# Altium PCB Main.PcbDoc
Units mil, origin at the board's own origin, x right, y up, seen from the top; angles counter-clockwise.
Board outline 4600 x 6680 mil, 2 copper layers (Top Layer, Bottom Layer); 76 components, 76 nets, 286 pads, 23 vias.
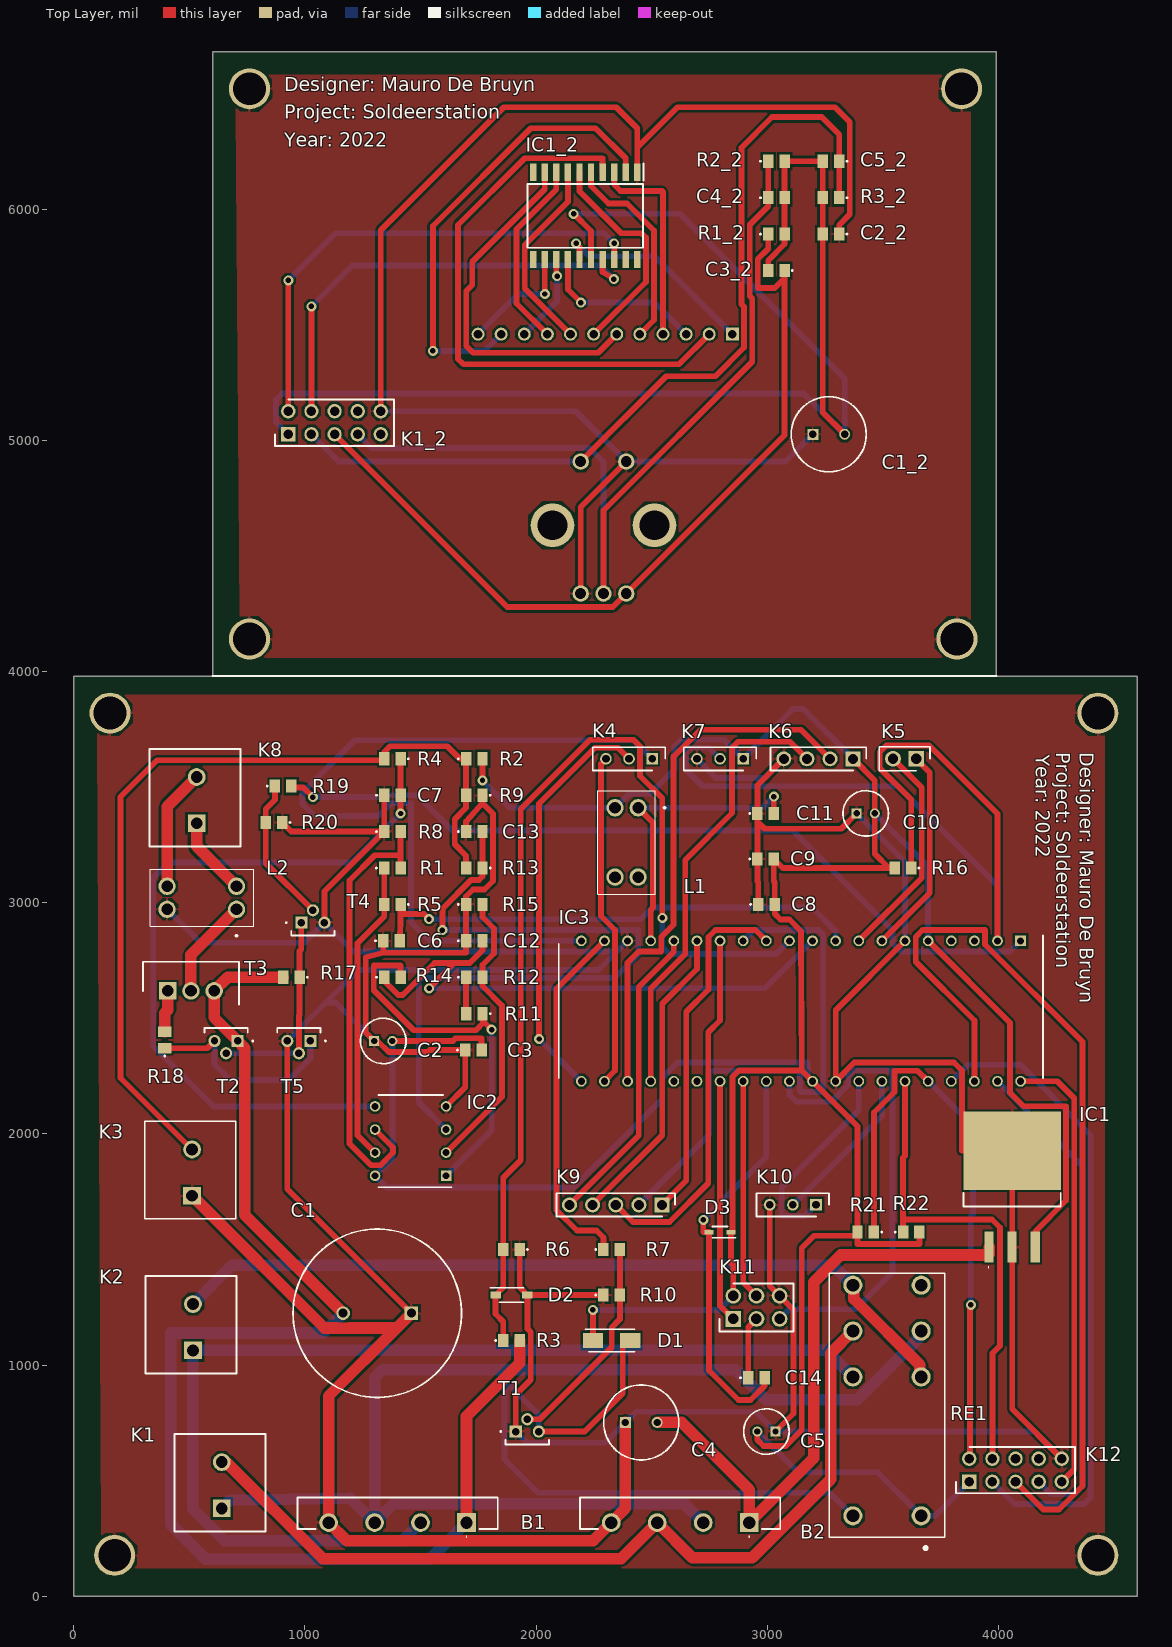
[diagram p0: Top Layer view]
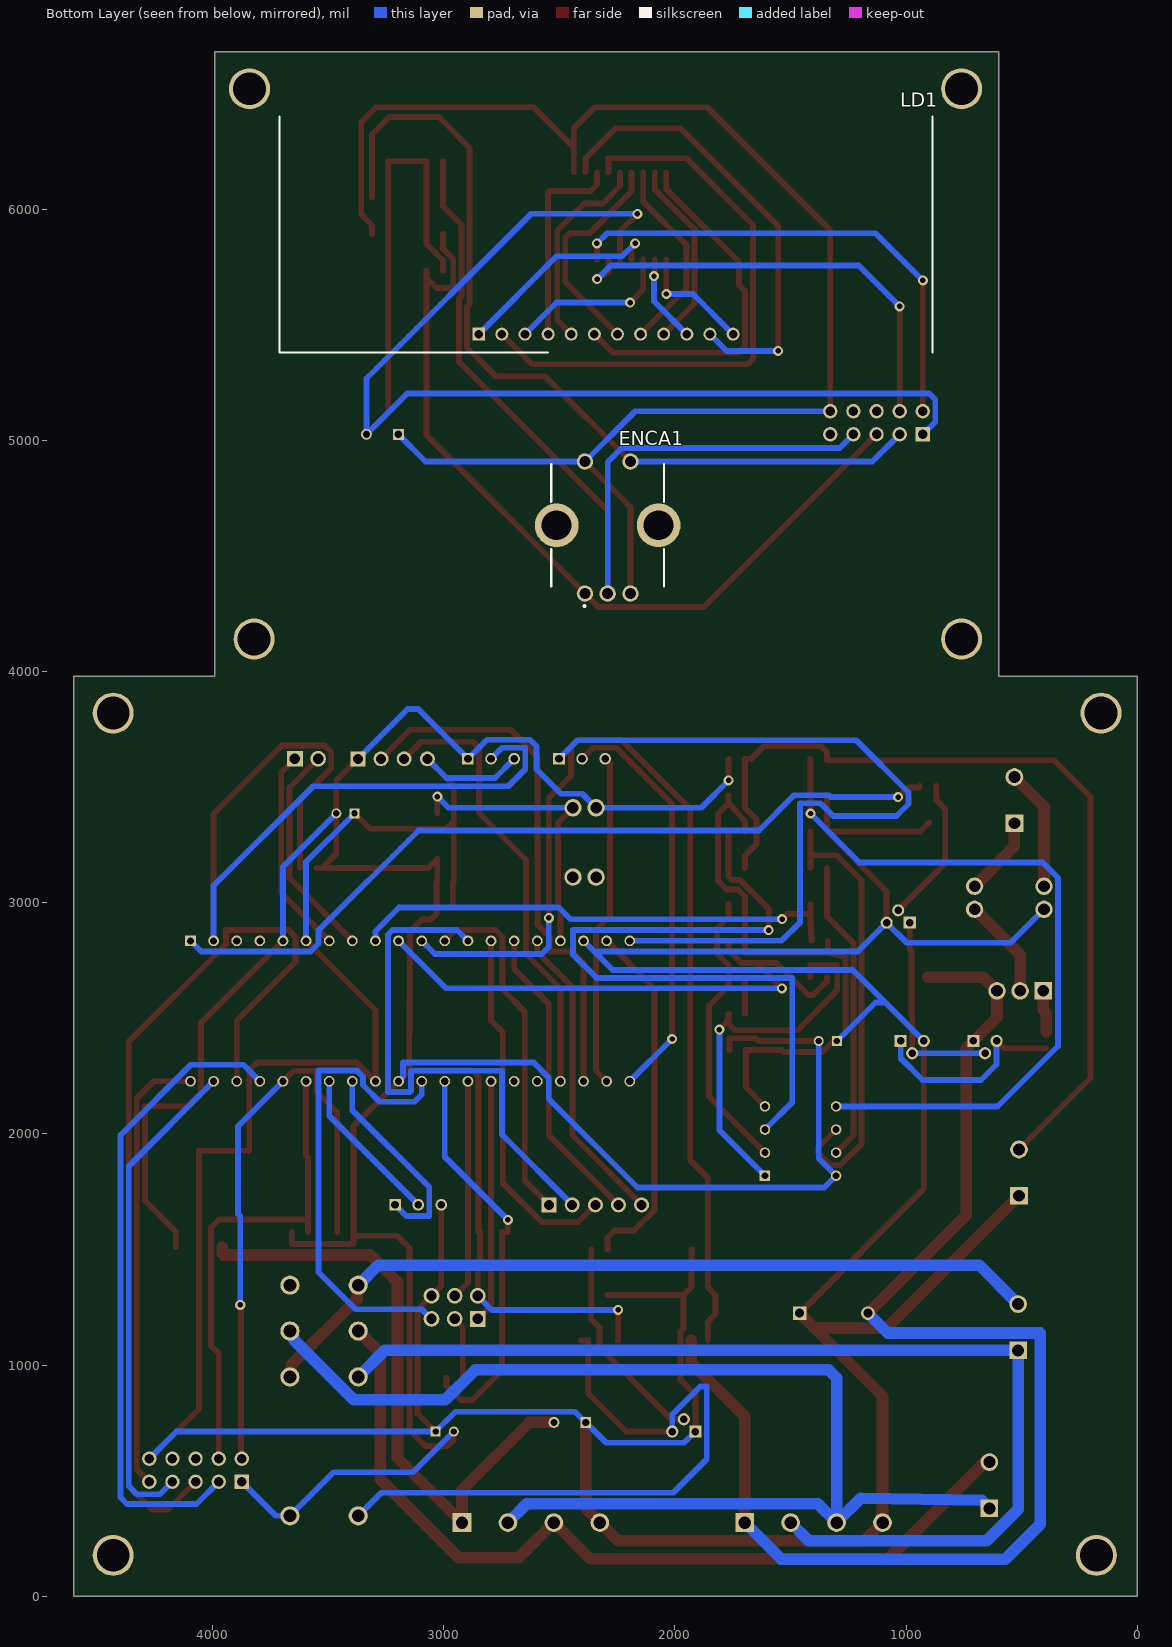
[diagram p1: Bottom Layer view, seen from below]
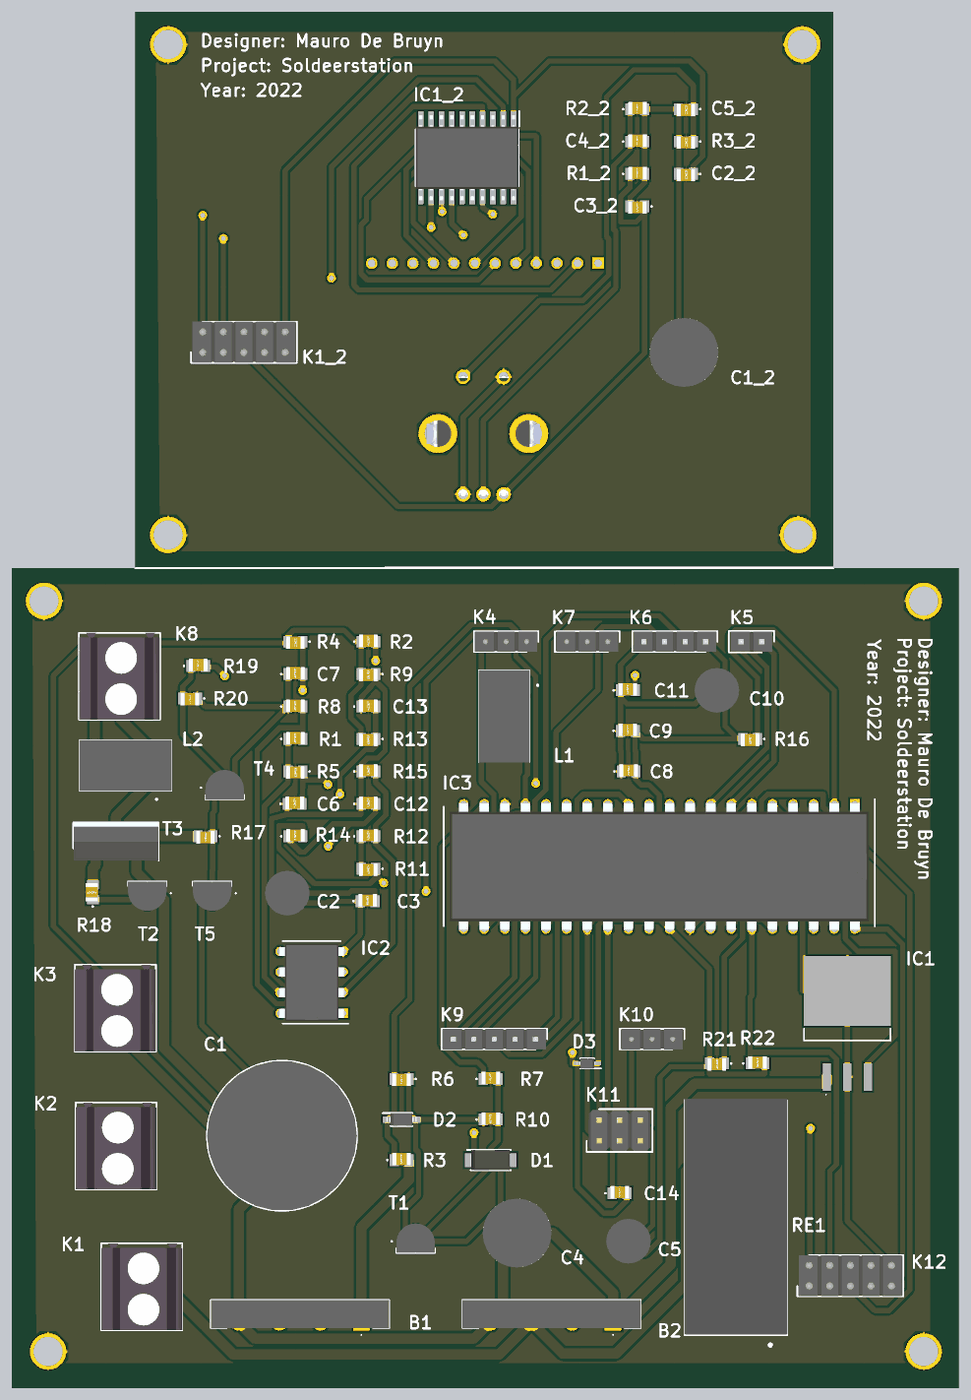
[diagram p2: 3D render of the assembled board from above, using the file's embedded part models]

## Layer stack, top to bottom
Top Solder: solder mask 0.4, Solder Resist, Dk 3.5
Top Layer: signal copper 1.4
Dielectric 1: dielectric 12.6, FR-4, Dk 4.8
Bottom Layer: signal copper 1.4
Bottom Solder: solder mask 0.4, Solder Resist, Dk 3.5

## Board outline
600,6680 3990,6680 3990,3980 4600,3980 4600,0 0,0 0,3980 600,3980 600,6620

## Design rules (kind name [scope] priority, off if disabled: settings)
Clearance [All] p1: gap=10 ignorepadtopadclearanceinfootprint=FALSE except(0: Arc-Hole Track-Hole SMDPad-Hole THPad-Hole Via-Hole Fill-Hole Poly-Hole Region-Hole Text-Hole)
Height [All] p1 off: minheight=0 maxheight=1000 prefheight=500
PolygonConnect [All] p1: connectstyle=Relief reliefconductorwidth=10 reliefentries=4 polygonreliefangle="90 Angle" airgapwidth=10
RoutingVias [All] p1: holewidth=23.62 width=43.31 viastyle="Through Hole" minholewidth=23.62 minwidth=43.31 maxholewidth=23.62 maxwidth=43.31
SolderMaskExpansion [All] p1: expansion=4 istentingtop=FALSE
Width [All] p1: maxlimit=50 minlimit=25 preferedwidth=25 minimp=50.000000 maximp=50.000000 favimp=50.000000
29 further rules are at their usual default settings.

## Classes and differential pairs
component class Transistor: K8 L2 R17 R18 R19 R20 T2 T3 T4 T5
component class Opam: C2 C3 C6 C7 C12 C13 IC2 K3 R1 R2 R4 R5 R8 R9 R11 R12 R13 R14 R15
component class Display: C1_2 C2_2 C3_2 C4_2 C5_2 ENCA1 IC1_2 K1_2 LD1 R1_2 R2_2 R3_2
component class CPU: C8 C9 C10 C11 C14 D3 IC3 K4 K5 K6 K7 K9 K10 K11 K12 L1 R16 R21 R22
component class "Bridge Rectifier": B1 B2 C1 C4 C5 D1 D2 IC1 K1 K2 R3 R6 R7 R10 RE1 T1

## Components (designator, comment, footprint, x,y, rotation, side; value= is the part's Value field where it differs from the comment)
B1 "GBU606-G" GBU606G 1698.5,318.58 r0 top
B2 "GBU606-G" GBU606G 2920.94,318.58 r0 top
C1 "4700µF" CAPPRD750W80D1850H4150 1460.32,1224.09 r180 top
C1_2 "100µF" CAPPRD350W60D825H1300 3196.46,5025.59 r0 top
C2 "10µF" CAPPRD200W52D500H1250 1299.21,2401.57 r0 top
C2_2 "100n" C0805 3275.2,5891.73 r180 top
C3 "100n" C0805 1728.35,2362.2 r0 top
C3_2 "10n" C0805 3038.98,5734.25 r180 top
C4 "100µF" CAPPRD350W60D825H1300 2385.51,751.65 r0 top
C4_2 "10n" C0805 3038.98,6049.21 r0 top
C5 "10µF" CAPPRD200W52D500H1250 3035.12,712.28 r180 top
C5_2 "10n" C0805 3275.2,6206.69 r180 top
C6 "10n" C0805 1374.02,2834.65 r0 top
C7 "10n" C0805 1377.95,3464.57 r0 top
C8 "100n" C0805 2996.06,2992.13 r0 top
C9 "100n" C0805 2992.13,3188.98 r0 top
C10 "10µF" CAPPRD200W52D500H1250 3385.83,3385.83 r0 top
C11 "100n" C0805 2992.13,3385.83 r0 top
C12 "10n" C0805 1732.28,2834.65 r0 top
C13 "10n" C0805 1732.28,3307.09 r0 top
C14 "100n" C0805 2952.76,944.88 r0 top
D1 "FM4007W-W" DIOM5025X231N 2326.46,1105.98 r0 top
D2 "5.1V" SOD3716X135N 1893.39,1302.83 r0 top
D3 "MMSZ4" SOD2512X110N 2795.28,1574.8 r180 top
ENCA1 "PEC11R-4225F-S0024" PEC12R-4XXXF-SXXXX_1 2290.94,4631.89 r180 bottom
IC1 "TL780-05CKTTR" TL78005CKTTR 4058.74,1775.28 r0 top
IC1_2 "TM1637" tm1637 2212.2,5970.47 r270 top
IC2 "MCP6002-E_P" DIP781W56P254L950H533Q8N 1456.69,1968.5 r180 top
IC3 "ATMEGA4809-PF" DIP1543W58P254L5175H635Q40N 3145.28,2530.91 r270 top
K1 "2 Pin Connector 1716020000" 1716020000 640,380 r90 top
K1_2 "10Box Header (Flat Cable)" 10BoxHeader 927.95,5025.59 r0 top
K2 "2 Pin Connector 1716020000" 1716020000 515.43,1063.46 r90 top
K3 "2 Pin Connector 1716020000" 1716020000 511.81,1732.28 r90 top
K4 "M20-9990345" HDRV3W64P0X254_1X3_762X254X864P 2501.57,3622.05 r180 top
K5 "M20-9990246" HDRV2W66P0X254_1X2_508X254X874P 3643.31,3622.05 r180 top
K6 "UART2" HDRV4W64P0X254_1X4_1016X254X834P 3370.87,3622.05 r180 top
K7 "M20-9990345" HDRV3W64P0X254_1X3_762X254X864P 2895.28,3622.05 r180 top
K8 "2 Pin Connector 1716020000" 1716020000 531.5,3343.31 r90 top
K9 "M20-9990545" HDRV5W64P0X254_1X5_1270X254X864P 2544.09,1692.91 r180 top
K10 "UART0" HDRV3W64P0X254_1X3_762X254X864P 3210.24,1692.91 r180 top
K11 "M20-9760342" HDRV6W66P254_2X3_762X508X830P 2852.76,1199.21 r0 top
K12 "10Box Header (Flat Cable)" 10BoxHeader 3873.23,494.96 r0 top
L1 "10μH" VLS56045 2440.94,3410.24 r180 top
L2 "100MH" CM2545X171B10 703.7,2970.87 r90 top
LD1 "7 Sigment" 7-Sigment 2548.43,5458.66 r90 bottom
R1 "18K" C0805 1377.95,3149.61 r0 top
R1_2 "10K" C0805 3038.98,5891.73 r0 top
R2 "1M" C0805 1732.28,3622.05 r0 top
R2_2 "10K" C0805 3038.98,6206.69 r0 top
R3 "68K" C0805 1893.39,1105.98 r0 top
R3_2 "10K" C0805 3275.2,6049.21 r180 top
R4 "5K6" C0805 1377.95,3622.05 r180 top
R5 "5K6" C0805 1377.95,2992.13 r180 top
R6 "10K" C0805 1893.39,1499.68 r180 top
R7 "10K" C0805 2326.46,1499.68 r0 top
R8 "100Ω" C0805 1377.95,3307.09 r0 top
R9 "10M" C0805 1732.28,3464.57 r180 top
R10 "4K7" C0805 2326.46,1302.83 r0 top
R11 "18K" C0805 1732.28,2519.68 r180 top
R12 "18K" C0805 1732.28,2677.17 r0 top
R13 "5K6" C0805 1732.28,3149.61 r180 top
R14 "5K6" C0805 1377.95,2677.17 r0 top
R15 "100Ω" C0805 1732.28,2992.13 r0 top
R16 "4K7" C0805 3586.61,3149.61 r180 top
R17 "4K7" C0805 940.94,2677.17 r180 top
R18 "100Ω" C0805 393.7,2405.51 r90 top
R19 "10K" C0805 905.51,3503.94 r0 top
R20 "4K7" C0805 866.14,3346.46 r180 top
R21 "4K7" C0805 3425.2,1574.8 r180 top
R22 "4K7" C0805 3622.05,1574.8 r0 top
RE1 "RT424005" RT42 3517.4,347.72 r90 top
T1 "BC547CBU" BC547CBU 1911.5,712.28 r0 top
T2 "BC547CBU" BC547CBU 708.66,2401.57 r180 top
T3 "IRF9Z34NPBF" TO254P469X1042X1967-3P 406.81,2618.11 r0 top
T4 "BC547CBU" BC547CBU 984.25,2913.39 r0 top
T5 "BC547CBU" BC547CBU 1023.62,2401.57 r180 top

## Footprints (in the part's own frame and the unit in brackets; to place one, negate y for a bottom-side part, rotate by r counter-clockwise, add the part's x,y. Pads: shape width x height; smd on the part's side, far side on the other; paste and mask are expansions set on the pad)
7-Sigment [mm]
  rect 1.425x1.425 hole 0.95: 1(0,7.62)
  round 1.425 hole 0.95: 2(0,5.08) 3(0,2.54) 4(0,0) 5(0,-2.54) 6(0,-5.08) 7(0,-7.62) 8(0,-10.16) 9(0,-12.7) 10(0,-15.24) 11(0,-17.78) 12(0,-20.32)
  silkscreen extent -2.02,-42.22 23.92,29.52
10BoxHeader [mm]
  rect 1.575x1.575 hole 1.05: 1(0,0)
  round 1.575 hole 1.05: 2(0,2.54) 3(2.54,0) 4(2.54,2.54) 5(5.08,0) 6(5.08,2.54) 7(7.62,0) 8(7.62,2.54) 9(10.16,0) 10(10.16,2.54)
  silkscreen extent -1.46,-1.27 11.62,3.81, body extent -1.27,-1.27 11.43,3.81, height 8.64
1716020000 [mm]
  rect 1.95x1.95 hole 1.3: 1(0,0)
  round 1.95 hole 1.3: 2(5.08,0)
  silkscreen extent -2.54,-4.8 8.17,5.2, body extent -2.54,-4.8 8.17,5.2, height 13.8
BC547CBU [mm]
  rect 1.333x1.333 hole 0.82: 1(0,0)
  round 1.333 hole 0.82: 2(1.27,1.35) 3(2.54,0)
  silkscreen extent -1.7,-1.43 3.65,0.05, body extent -1.11,-1.43 3.65,2.19, height 5.43
C0805 [mm]
  rect 1.15x1.45 smd: 1(-0.9,0) 2(0.9,0)
  silkscreen extent -1.8,-0.05 -1.7,0.05, body extent -1.14,-0.66 1.16,0.89, height 0.98
CAPPRD200W52D500H1250 [mm]
  rect 1.1x1.1 hole 0.7: 1(0,0)
  round 1.1 hole 0.7: 2(2,0)
  silkscreen extent -1.5,-2.5 3.5,2.5, body extent -1.75,-2.75 3.75,2.75, height 12.5
CAPPRD350W60D825H1300 [mm]
  rect 1.2x1.2 hole 0.8: 1(0,0)
  round 1.2 hole 0.8: 2(3.5,0)
  silkscreen extent -2.38,-4.12 5.87,4.12, body extent -2.5,-4.25 6,4.25, height 13
CAPPRD750W80D1850H4150 [mm]
  rect 1.5x1.5 hole 1: 1(0,0)
  round 1.5 hole 1: 2(7.5,0)
  silkscreen extent -5.5,-9.25 13,9.25, body extent -5.5,-9.25 13,9.25, height 41.5
CM2545X171B10 [mil]
  round 75 hole 50: 1(0,0) 2(100,0) 3(100,300) 4(0,300)
  silkscreen extent -118,-74 174,374, body extent -74,-74 174,374, height 378
DIOM5025X231N [mm]
  rect 2.25x1.7 smd: 1(-2.05,0) 2(2.05,0)
  silkscreen extent -2.9,-1.24 2.5,1.24, body extent -2.5,-1.24 2.5,1.24, height 2.31
DIP781W56P254L950H533Q8N [mil]
  rect 45.59x45.59 hole 29.84: 1(-153.74,150)
  round 45.59 hole 29.84: 2(-153.74,50) 3(-153.74,-50) 4(-153.74,-150) 5(153.74,-150) 6(153.74,-50) 7(153.74,50) 8(153.74,150)
  silkscreen extent -177,-200 140,200, body extent -159,-187 159,187, height 210
DIP1543W58P254L5175H635Q40N [mm]
  rect 1.184x1.184 hole 0.784: 1(-7.715,24.13)
  round 1.184 hole 0.784: 2(-7.715,21.59) 3(-7.715,19.05) 4(-7.715,16.51) 5(-7.715,13.97) 6(-7.715,11.43) 7(-7.715,8.89) 8(-7.715,6.35) 9(-7.715,3.81) 10(-7.715,1.27) 11(-7.715,-1.27) 12(-7.715,-3.81) 13(-7.715,-6.35) 14(-7.715,-8.89) 15(-7.715,-11.43) 16(-7.715,-13.97) 17(-7.715,-16.51) 18(-7.715,-19.05) 19(-7.715,-21.59) 20(-7.715,-24.13) 21(7.715,-24.13) 22(7.715,-21.59) 23(7.715,-19.05) 24(7.715,-16.51) 25(7.715,-13.97) 26(7.715,-11.43) 27(7.715,-8.89) 28(7.715,-6.35) 29(7.715,-3.81) 30(7.715,-1.27) 31(7.715,1.27) 32(7.715,3.81) 33(7.715,6.35) 34(7.715,8.89) 35(7.715,11.43) 36(7.715,13.97) 37(7.715,16.51) 38(7.715,19.05) 39(7.715,21.59) 40(7.715,24.13)
  silkscreen extent -8.31,-26.61 7.37,26.61, body extent -7.86,-25.88 7.86,25.88, height 6.35
GBU606G [mm]
  rect 2.055x2.055 hole 1.37: 1(0,0)
  round 2.055 hole 1.37: 2(-5.05,0) 3(-10.1,0) 4(-15.15,0)
  silkscreen extent -18.58,-1.6 3.42,2.76, body extent -18.57,-0.69 3.43,2.76, height 21.05
HDRV2W66P0X254_1X2_508X254X874P [mm]
  rect 1.725x1.725 hole 1.15: 1(0,0)
  round 1.725 hole 1.15: 2(2.54,0)
  silkscreen extent -1.52,-1.32 4.06,1.32, body extent -1.27,-1.27 3.81,1.27, height 8.74
HDRV3W64P0X254_1X3_762X254X864P [mm]
  rect 1.275x1.275 hole 0.85: 1(0,0)
  round 1.275 hole 0.85: 2(2.54,0) 3(5.08,0)
  silkscreen extent -1.44,-1.27 6.52,1.27, body extent -1.27,-1.27 6.35,1.27, height 8.64
HDRV4W64P0X254_1X4_1016X254X834P [mm]
  rect 1.65x1.65 hole 1.1: 1(0,0)
  round 1.65 hole 1.1: 2(2.54,0) 3(5.08,0) 4(7.62,0)
  silkscreen extent -1.44,-1.27 9.07,1.27, body extent -1.27,-1.27 8.89,1.27, height 8.34
HDRV5W64P0X254_1X5_1270X254X864P [mm]
  rect 1.65x1.65 hole 1.1: 1(0,0)
  round 1.65 hole 1.1: 2(2.54,0) 3(5.08,0) 4(7.62,0) 5(10.16,0)
  silkscreen extent -1.44,-1.27 11.61,1.27, body extent -1.27,-1.27 11.43,1.27, height 8.64
HDRV6W66P254_2X3_762X508X830P [mm]
  rect 1.725x1.725 hole 1.15: 1(0,0)
  round 1.725 hole 1.15: 2(0,2.54) 3(2.54,0) 4(2.54,2.54) 5(5.08,0) 6(5.08,2.54)
  silkscreen extent -1.52,-1.37 6.6,3.91, body extent -1.27,-1.27 6.35,3.81, height 8.38
PEC12R-4XXXF-SXXXX_1 [mm]
  round 1.8 hole 1.2: 1(-2.5,-7.5) 2(2.5,-7.5) 3(0,-7.5) 4(-2.5,7) 5(2.5,7)
  round 4.8 hole 3.28: 6(5.6,0) 7(-5.6,0)
  silkscreen extent -6.2,-8.95 6.2,6.7, body extent -7,-7.75 6.99,7.15, height 31.51
RT42 [mm]
  round 2.1 hole 1.4: 1(0,-3.75) 2(15.26,-3.75) 3(20.3,-3.75) 4(25.34,-3.75) 5(25.34,3.75) 6(20.3,3.75) 7(15.26,3.75) 8(0,3.75)
  silkscreen extent -3.67,-6.35 26.65,6.35, body extent -2.21,-6.35 26.79,6.35, height 15.86
SOD2512X110N [mm]
  rect 1x0.5 smd: 1(-1.2,0) 2(1.2,0)
  silkscreen extent -1.7,-0.63 0.85,0.63, body extent -1.25,-0.63 1.25,0.63, height 1.1
SOD3716X135N [mm]
  rect 1.15x0.8 smd: 1(-1.75,0) 2(1.75,0)
  silkscreen extent -2.33,-0.8 1.34,0.8, body extent -1.86,-0.8 1.86,0.8, height 1.35
TL78005CKTTR [mm]
  rect 1x3.4 smd: 1(-2.54,-6.745) 2(0,-6.745) 3(2.54,-6.745)
  rect 10.7x8.6 smd: 4(0,3.855)
  silkscreen extent -5.33,-9 5.33,-0.8
tm1637 [mm]
  rect 1.9x0.7 smd: 1(-4.8,5.715) 2(-4.8,4.445) 3(-4.8,3.175) 4(-4.8,1.905) 5(-4.8,0.635) 6(-4.8,-0.635) 7(-4.8,-1.905) 8(-4.8,-3.175) 9(-4.8,-4.445) 10(-4.8,-5.715) 11(4.8,-5.715) 12(4.8,-4.445) 13(4.8,-3.175) 14(4.8,-1.905) 15(4.8,-0.635) 16(4.8,0.635) 17(4.8,1.905) 18(4.8,3.175) 19(4.8,4.445) 20(4.8,5.715)
  silkscreen extent -5.75,-6.35 3.5,6.42, body extent -5.23,-6.35 5.23,6.35, height 2.8
TO254P469X1042X1967-3P [mm]
  rect 1.92x1.92 hole 1.28: 1(0,0)
  round 1.92 hole 1.28: 2(2.54,0) 3(5.08,0)
  silkscreen extent -2.73,-1.49 7.81,3.2, body extent -2.67,-1.5 7.75,3.19, height 18.84
VLS56045 [mil]
  round 75 hole 50: 1(0,0) 2(100,0) 3(100,300) 4(0,300)
  silkscreen extent -118,-74 174,374, body extent -74,-74 174,374, height 378

## Part data
B1 B2: "Bridge Rectifier", Manufacturer_Name="Comchip Technology", Datasheet Link=https://www.comchiptech.com/product.php?id=2217, Height=20.95mm, Manufacturer_Part_Number=GBU606-G
C1: library part 50PK4700MEFC18X40, "Capacitor Polarised", Manufacturer_Name=Rubycon, Mouser2 Part Number=232-50PK4700MEFC18X4, Datasheet Link=https://componentsearchengine.com//50PK4700MEFC18X40.pdf, Height=41.5mm, Manufacturer_Part_Number=50PK4700MEFC18X40, Mouser2 Price/Stock=https://www.mouser.com/Search/Refine.aspx?Keyword=232-50PK4700MEFC18X4
C1_2 C4: library part RGA101M1HBK-0811G, "Capacitor Polarised", Manufacturer_Name=Lelon, Datasheet Link=https://www.arrow.com/en/products/rga101m1hbk-0811g/lelon-electronics, Height=13mm, Manufacturer_Part_Number=RGA101M1HBK-0811G
C2 C5 C10: library part 860020672010, "Capacitor Polarised", Manufacturer_Name="Wurth Elektronik", Mouser2 Part Number=710-860020672010, Datasheet Link=https://componentsearchengine.com//860020672010.pdf, Height=12.5mm, Manufacturer_Part_Number=860020672010, Mouser2 Price/Stock=https://www.mouser.com/Search/Refine.aspx?Keyword=710-860020672010
C2_2 C3 C3_2 C4_2 C5_2 C6 C7 C8 C9 C11 C12 C13 C14: library part 0805_1, "Capacitor", Manufacturer_Name=Kemet, Manufacturer_Part_Number=C0805C391G3GACTU, Datasheet Link=https://content.kemet.com/datasheets/KEM_C1003_C0G_SMD.pdf, Height=1.1mm
D1: "Bridge Rectifier", Manufacturer_Name=Rectron, Mouser2 Part Number=583-FM4007W-W, Datasheet Link=https://componentsearchengine.com//FM4007W-W.pdf, Height=2.31mm, Manufacturer_Part_Number=FM4007W-W, Mouser2 Price/Stock=https://www.mouser.com/Search/Refine.aspx?Keyword=583-FM4007W-W
D2: library part MMSZ4689T1G, "Zener Diode", Manufacturer_Name="ON Semiconductor", Mouser2 Part Number=863-MMSZ4689T1G, Datasheet Link=https://componentsearchengine.com//MMSZ4689T1G.pdf, Height=1.35mm, Manufacturer_Part_Number=MMSZ4689T1G, Mouser2 Price/Stock=https://www.mouser.com/Search/Refine.aspx?Keyword=863-MMSZ4689T1G
D3: library part SMMDL914T1G, "Diode", Manufacturer_Name="ON Semiconductor", Mouser2 Part Number=863-SMMDL914T1G, Datasheet Link=https://componentsearchengine.com//SMMDL914T1G.pdf, Height=1.1mm, Manufacturer_Part_Number=SMMDL914T1G, Mouser2 Price/Stock=https://www.mouser.com/Search/Refine.aspx?Keyword=863-SMMDL914T1G
ENCA1: "Undefined or Miscellaneous", Manufacturer_Name=Bourns, Mouser2 Part Number=652-PEC11R-4225F-S24, Datasheet Link=https://componentsearchengine.com//PEC11R-4225F-S0024.pdf, Manufacturer_Part_Number=PEC11R-4225F-S0024, Mouser2 Price/Stock=https://www.mouser.com/Search/Refine.aspx?Keyword=652-PEC11R-4225F-S24
IC1: "Integrated Circuit", Manufacturer_Name="Texas Instruments", Datasheet Link=http://www.ti.com/general/docs/suppproductinfo.tsp?distId=26&gotoUrl=http%3A%2F%2Fwww.ti.com%2Flit%2Fgpn%2Ftl780, Height=5.08mm, Manufacturer_Part_Number=TL780-05CKTTR
IC1_2: library part TM1637__SOP_, "Integrated Circuit", Manufacturer_Name="TITAN MICRO ELECTRONICS", Manufacturer_Part_Number="TM1637 (SOP)", Datasheet Link=https://www.mcielectronics.cl/website_MCI/static/documents/Datasheet_TM1637.pdf, Height=2.8mm
IC2: "Integrated Circuit", Manufacturer_Name=Microchip, Manufacturer_Part_Number=MCP6002-E/P, Mouser2 Part Number=579-MCP6002-E/P, Datasheet Link=https://componentsearchengine.com//MCP6002-E_P.pdf, Height=5.334mm, Mouser2 Price/Stock=https://www.mouser.com/Search/Refine.aspx?Keyword=579-MCP6002-E%2FP
IC3: "Integrated Circuit", Manufacturer_Name=Microchip, Mouser2 Part Number=556-ATMEGA4809-PF, Datasheet Link=https://componentsearchengine.com//ATMEGA4809-PF.pdf, Height=6.35mm, Manufacturer_Part_Number=ATMEGA4809-PF, Mouser2 Price/Stock=https://www.mouser.com/Search/Refine.aspx?Keyword=556-ATMEGA4809-PF
K1 K2 K3 K8: "Connector", Manufacturer_Name=Weidmuller, Manufacturer_Part_Number=1716020000, Datasheet Link=https://catalog.weidmueller.com/catalog/Start.do?ObjectID=1716020000&_ga=2.21797499.1716783809.1613378202-511725545.1613378202
K4 K7: "Connector 3-PIN", Manufacturer_Name=Harwin, Mouser2 Part Number=855-M20-9990345, Datasheet Link=https://componentsearchengine.com//M20-9990345.pdf, Height=8.64mm, Manufacturer_Part_Number=M20-9990345, Mouser2 Price/Stock=https://www.mouser.com/Search/Refine.aspx?Keyword=855-M20-9990345
K5: "Connector 2-PIN", Manufacturer_Name=Harwin, Mouser2 Part Number=855-M20-9990246, Datasheet Link=https://componentsearchengine.com//M20-9990246.pdf, Height=8.74mm, Manufacturer_Part_Number=M20-9990246, Mouser2 Price/Stock=https://www.mouser.com/Search/Refine.aspx?Keyword=855-M20-9990246
K6: library part M20-9770446, "Connector 4-PIN", Manufacturer_Name=Harwin, Mouser2 Part Number=855-M20-9770446, Datasheet Link=https://componentsearchengine.com//M20-9770446.pdf, Height=8.34mm, Manufacturer_Part_Number=M20-9770446, Mouser2 Price/Stock=https://www.mouser.com/Search/Refine.aspx?Keyword=855-M20-9770446
K9: "Connector 5-PIN", Manufacturer_Name=Harwin, Mouser2 Part Number=855-M20-9990545, Datasheet Link=https://componentsearchengine.com//M20-9990545.pdf, Height=8.64mm, Manufacturer_Part_Number=M20-9990545, Mouser2 Price/Stock=https://www.mouser.com/Search/Refine.aspx?Keyword=855-M20-9990545
K10: library part M20-9990345, "Connector 3-PIN", Manufacturer_Name=Harwin, Mouser2 Part Number=855-M20-9990345, Datasheet Link=https://componentsearchengine.com//M20-9990345.pdf, Height=8.64mm, Manufacturer_Part_Number=M20-9990345, Mouser2 Price/Stock=https://www.mouser.com/Search/Refine.aspx?Keyword=855-M20-9990345
K11: "Connector 6-PIN", Manufacturer_Name=Harwin, Datasheet Link=https://cdn.harwin.com/pdfs/M20-976.pdf, Height=8.3mm, Manufacturer_Part_Number=M20-9760342
L1: library part VLS6045EX-100M-H, "Inductor", Manufacturer_Name=TDK, Mouser2 Part Number=810-VLS6045EX-100M-H, Datasheet Link=https://componentsearchengine.com//VLS6045EX-100M-H.pdf, Manufacturer_Part_Number=VLS6045EX-100M-H, Mouser2 Price/Stock=https://www.mouser.com/Search/Refine.aspx?Keyword=810-VLS6045EX-100M-H
L2: library part CM2545X171B-10, "Transformer", Manufacturer_Name="Laird Technologies", Datasheet Link=https://datasheet.datasheetarchive.com/originals/dk/DKDS-7/122753.pdf, Height=9.5mm, Manufacturer_Part_Number=CM2545X171B-10
R1 R1_2 R2 R2_2 R3 R3_2 R4 R5 R6 R7 R8 R9 R10 R11 R12 R13 R14 R15 R16 R17 R18 R19 R20 R21 R22: library part 0805, "Resistor", Manufacturer_Name=Kemet, Manufacturer_Part_Number=C0805C391G3GACTU, Datasheet Link=https://content.kemet.com/datasheets/KEM_C1003_C0G_SMD.pdf, Height=1.1mm
RE1: "Relay or Contactor", Manufacturer_Name="TE Connectivity", Mouser2 Part Number=655-RT424005, Datasheet Link=https://componentsearchengine.com//RT424005.pdf, Manufacturer_Part_Number=RT424005, Mouser2 Price/Stock=https://www.mouser.com/Search/Refine.aspx?Keyword=655-RT424005
T1 T2 T4 T5: "Transistor BJT NPN", Manufacturer_Name="ON Semiconductor", Datasheet Link=https://www.onsemi.com/pdf/datasheet/bc550-d.pdf, Height=5.33mm, Manufacturer_Part_Number=BC547CBU
T3: "MOSFET (P-Channel)", Manufacturer_Name=Infineon, Mouser2 Part Number=942-IRF9Z34NPBF, Datasheet Link=https://componentsearchengine.com//IRF9Z34NPBF.pdf, Height=4.69mm, Manufacturer_Part_Number=IRF9Z34NPBF, Mouser2 Price/Stock=https://www.mouser.com/Search/Refine.aspx?Keyword=942-IRF9Z34NPBF

## Free pads (board coordinates)
  round 177.17 hole 141.73: "Mount 2"(176.85,176.85) "Mount 3"(156.85,3819.53) "Mount 4"(4429.45,3819.53) "Mount 5"(4429.45,176.85) "Mount 6"(760,4140) "Mount 7"(3820,4140) "Mount 8"(3840,6520) "Mount 9"(760,6520)

## Via types
v1: diameter 43.31, hole 23.62, Top Layer to Bottom Layer, 23 vias

## Nets (pads, with @x,y where several pads share a name; then routed paths per layer and width w, separated by ;. In a path a pad name is that pad's centre, name@x,y a point inside that pad or via, vN(x,y) a via of type N, cw(c..) or ccw(c..) an arc to the next point about the centre after c; other vN are vias at no path point)
+5: C2.2 C3.2 C5.2 C8.2 C9.2 C10.2 D1.1 D3.1 IC1.3 IC2.8 IC3.5 IC3.31 K6.1 K7.1 K11.2 K12.1 L1.2 R2.2 R16.2 R21.2 R22.2 RE1.1 | length 15552.6
  Top Layer w25: C2.2 1639.57,2401.57 1651.25,2413.25 1763.78,2413.25 C3.2 ; v1(1767.72,3528.38) R2.2 ; v1(2245.38,1238.38) 2245.38,1105.98 D1.1 ; K11.2 2852.76,1431.38 2842.52,1441.61 D3.1 2849.38,1574.8 2849.38,2246.38 2876.38,2273.38 3149.06,2273.38 ; C5.2 2956.38,676.38 2983.38,649.38 3079.38,649.38 3148.38,718.38 3148.38,1506.38 3201.38,1559.38 R21.2@3389.76,1559.38 ; K6.1 3464.57,3528.35 C10.2 3464.57,3211.42 3526.38,3149.61 ; R16.2 3526.38,3149.61 ; R22.2 3657.48,1523.38 3389.76,1523.38 R21.2@3389.76,1559.38 ; IC3.5 4049.38,2480.54 4049.38,2177.38 4107.92,2118.84 4291.87,2118.84 4291.87,1711.02 4158.74,1577.89 IC1.3 ; 3149.06,2273.38 3145.38,2876.38 3095.38,2926.38 3056.5,2926.38 3031.5,2951.38 C8.2 3031.5,3088.38 3027.56,3092.31 C9.2 3066.93,3149.61 3526.38,3149.61 ; 3149.06,2273.38 IC3.31 3389.76,2032.68 R21.2 R21.2@3389.76,1559.38
  Bottom Layer w25: C2.2 1377.95,1893.5 IC2.8 1354.08,1767.38 2162.38,1767.38 2545.38,2150.38 2545.38,2242.38 2610.97,2307.97 3176.08,2307.97 3176.08,2246.36 IC3.31 ; v1(1767.72,3528.38) 1885.86,3410.24 L1.2 2401.09,3470.38 2492.38,3470.38 2598.38,3576.38 2598.38,3676.65 2626.38,3704.65 2812.68,3704.65 K7.1 3110.61,3837.38 3155.54,3837.38 K6.1 ; v1(2245.38,1238.38) 2791.92,1238.38 K11.2 ; C5.2 3132.28,536.38 3476.38,536.38 RE1.1 3725.98,347.72 K12.1 ; C10.2 3695.28,3155.12 IC3.5
+5_Display: C1_2.2 C2_2.2 C3_2.2 C4_2.2 C5_2.2 IC1_2.16 K1_2.1 R1_2.2 R2_2.2 R3_2.2 | length 6541.2
  Top Layer w25: v1(2162.38,5979.38) 2237.2,5904.55 IC1_2.16 ; C3_2.2 3003.54,5777.38 3074.41,5848.24 R1_2.2 C4_2.2 R2_2.2 C5_2.2 R3_2.2 C2_2.2 3239.76,5120.08 C1_2.2
  Bottom Layer w25: K1_2.1 874.38,5079.16 874.38,5176.38 900.38,5202.38 3157.46,5202.38 C1_2.2 3334.25,5266.5 2621.38,5979.38 v1(2162.38,5979.38)
GND: "pad.Mount 2" "pad.Mount 3" "pad.Mount 4" "pad.Mount 5" B1.4 B2.4 C1.1 C2.1 C3.1 C4.1 C5.1 C6.1 C7.1 C8.1 C9.1 C10.1 C11.1 C12.1 C13.1 D2.2 IC1.2 IC1.4 IC2.4 IC3.6 IC3.18 IC3.32 K3.1 K6.4 K7.3 K10.3 K11.6 K12.10 L2.4 R6.1 R8.1 R9.1 R10.1 R15.1 R20.1 T1.1 T4.3 T5.3 | length 23215.7
  Top Layer w25: R20.1 940.95,3307.09 R8.1 ; T5.3 923.62,1760.79 C1.1 ; T4.3 1084.38,2913.39 1084.38,3048.94 R8.1 ; C6.1 1338.58,2783.38 ; C7.1 R8.1 ; IC2.4 1692.91,2200.98 C3.1 1539.38,2362.2 1530.55,2353.38 1362.38,2353.38 1314.18,2401.57 C2.1 1262.38,2438.41 1262.38,2763.21 1338.58,2783.38 ; C13.1 1696.85,3350.38 1767.72,3430.04 ; R9.1 1767.72,3430.04 ; T1.1 1911.5,871.5 1976.32,936.32 1976.32,1142.42 1962.28,1156.45 D2.2 1928.82,1336.3 R6.1 ; D2.2@1974.38,1302.83 R10.1 ; C8.1 2960.63,3088.38 2956.69,3092.32 C9.1 2956.69,3351.38 ; K10.3 3010.24,1341.73 K11.6 3113.38,1238.59 3113.38,790.54 C5.1 ; K6.4 2956.69,3507.87 C11.1 2956.69,3351.38 ; C10.1 3319.38,3319.38 2988.69,3319.38 2956.69,3351.38 ; IC3.6 3295.28,2534.65 IC3.32 3376.08,2307.97 3806.78,2307.97 3841.38,2273.38 3841.38,1927.05 IC1.4 IC1.2 4058.74,809.45 K12.10 ; 1338.58,2783.38 1696.85,2783.38 C12.1 R15.1 1696.85,3026.38 1727.09,3056.62 1776.38,3056.62 1813.38,3093.62 1813.38,3384.38 1767.72,3430.04
  Top Layer w50: K3.1 1084.1,1160 1137.88,1160 1138.31,1159.57 1191.77,1159.57 1192.2,1160 1396.22,1160 ; C1.1 1396.22,1160 ; C4.1 2385.51,379.61 B2.4 2245.91,240 1180.63,240 B1.4 1102.05,865.82 1396.22,1160
  Bottom Layer w25: L2.4 548.19,2826.38 997.24,2826.38 T4.3 1209.26,2788.38 2349.01,2788.38 ; T5.3 1090.4,2568.35 ; C2.1 1132.44,2568.35 1090.4,2568.35 ; T1.1 1960.4,663.38 2297.24,663.38 2431.99,798.13 2949.27,798.13 C5.1 4155.9,712.28 K12.10 ; IC3.18 2349.01,2788.38 ; K7.3 2777.88,3539.45 2988.27,3539.45 K6.4 ; C10.1 3595.28,3176.38 IC3.6 ; 1090.4,2568.35 1230.58,2708.53 2269.16,2708.53 2349.01,2788.38
GND_Display: "pad.Mount 6" "pad.Mount 7" "pad.Mount 8" "pad.Mount 9" C1_2.1 C2_2.1 ENCA1.2 ENCA1.4 IC1_2.1 K1_2.10 | length 6520.7
  Top Layer w25: K1_2.10 1327.95,5907.95 1860,6440 2346.58,6440 2437.2,6349.38 2437.2,6266.38 ; ENCA1.2 2192.52,4710.63 ENCA1.4 ; IC1_2.1 2437.2,6266.38 ; C2_2.1 3310.63,5931.38 3356.38,5977.13 3356.38,6376.38 3292.76,6440 2610.83,6440 2437.2,6266.38
  Bottom Layer w25: K1_2.10 2171.26,5125.59 ENCA1.4 3078.35,4907.48 C1_2.1
NetB1_2: B1.2 K2.1 RE1.7 | length 4662.4
  Bottom Layer w50: B1.2 1421.1,240 651.76,240 515.43,376.32 K2.1 3254.8,1063.46 RE1.7
NetB1_3: B1.3 B2.2 K1.1 RE1.3 | length 5403
  Bottom Layer w50: K1.1 658.56,399.24 658.87,399.56 673.46,414.15 1195.94,423.51 B1.3 ; B2.2 2640.71,400 1382.28,400 B1.3 ; RE1.3 3665.04,1138.09 3648.7,1121.75 3648.7,1108.7 3389.38,849.38 2993.38,849.38 2862.76,980 1335.49,980 1300.87,945.38 B1.3
NetB2_1: B2.1 C4.2 IC1.1 | length 2653.1
  Top Layer w50: C4.2 2629.1,751.65 2920.94,459.81 B2.1 3200,597.64 3200,1358 3317.88,1475.88 3953.42,1475.88 3958.74,1481.19 IC1.1
NetB2_3: B2.3 K1.2 RE1.6 | length 3736
  Top Layer w50: K1.2@660,580 1077.62,162.38 2367.1,162.38 B2.3 2675.51,166.38 2934.38,166.38 3274.38,506.38 3274.38,1051.54 RE1.6
NetC3_2_1: C3_2.1 ENCA1.1 K1_2.5 R1_2.1 | length 3662.3
  Top Layer w25: K1_2.5 1875.16,4278.38 2331.13,4278.38 ENCA1.1 3074.41,5021.65 3074.41,5701.38 ; R1_2.1 3003.54,5828.54 2958.38,5783.38 2958.38,5658.38 3031.41,5658.38 3074.41,5701.38 ; C3_2.1 3074.41,5701.38
NetC4_2_1: C4_2.1 ENCA1.3 K1_2.7 R2_2.1 | length 3856.2
  Top Layer w25: ENCA1.3 2290.95,4695.95 2934.38,5339.38 2934.38,5612.38 2923.38,5623.38 2923.38,5932.21 3003.54,6012.38 C4_2.1 R2_2.1
  Bottom Layer w25: K1_2.7 1287.16,4966.38 2230.38,4966.38 2290.95,4905.81 ENCA1.3
NetC5_2_1: C5_2.1 ENCA1.5 K1_2.3 R3_2.1 | length 3774.5
  Top Layer w25: ENCA1.5 2562.1,5277.06 2775.06,5277.06 2899.38,5401.38 2899.38,5577.38 2888.38,5588.38 2888.38,6265.38 3020.38,6397.38 3235.38,6397.38 3310.63,6322.13 C5_2.1 R3_2.1
  Bottom Layer w25: K1_2.3 1146.06,4907.48 ENCA1.5
NetC6_2: C6.2 IC3.9 R5.1 | length 2153.4
  Top Layer w25: C6.2 1413.39,2915.31 1413.39,2950.38 ; R5.1 1413.39,2950.38 ; v1(1536.38,2928.38) 1514.38,2950.38 1413.39,2950.38
  Bottom Layer w25: v1(1536.38,2928.38) 2451.07,2928.38 2501.22,2978.53 3193.12,2978.53 3295.28,2876.38 IC3.9
NetC7_2: C7.2 IC2.5 R4.1 | length 3217.5
  Top Layer w25: v1(1413.38,3385.38) C7.2 R4.1
  Bottom Layer w25: IC2.5 604.25,2118.5 343.38,2379.38 343.38,3107.38 409.38,3173.38 1201.38,3173.38 v1(1413.38,3385.38)
NetC11_2: C11.2 IC3.17 L1.1 | length 1285.6
  Top Layer w25: L1.1 2505.38,3345.8 2505.38,2977.38 2495.28,2967.28 IC3.17 ; C11.2 v1(3027.56,3458.38)
  Bottom Layer w25: L1.1 2979.42,3410.24 v1(3027.56,3458.38)
NetC12_2: C12.2 IC3.10 R14.1 | length 2484.5
  Top Layer w25: R14.1 1342.52,2661.12 1403.26,2600.38 1422.38,2600.38 1560.38,2738.38 1646.38,2738.38 ; v1(1537.38,2629.38) 1646.38,2738.38 ; C12.2 1767.72,2793.72 1712.38,2738.38 1646.38,2738.38
  Bottom Layer w25: v1(1537.38,2629.38) 2990.01,2629.38 IC3.10
NetC13_2: C13.2 IC2.3 R13.1 | length 3164.6
  Top Layer w25: v1(1594.38,2881.38) 1594.38,2973.4 1719.35,3098.38 1752.72,3098.38 1767.72,3113.38 R13.1 C13.2
  Bottom Layer w25: v1(1594.38,2881.38) 2441.38,2881.38 2441.38,2776.38 2338.53,2673.53 1492.38,2673.53 1492.38,2136.56 IC2.3
NetC14_1: C14.1 K11.3 | length 269
  Top Layer w25: C14.1 2917.32,1163.78 K11.3
NetC14_2: C14.2 D3.2 IC3.29 | length 1742.8
  Top Layer w25: v1(2722.95,1627.95) 2722.95,1574.8 D3.2@2747.38,1574.8 ; D3.2 D3.2@2747.38,1574.8 ; C14.2 2988.19,910.19 2926.38,848.38 2875.38,848.38 2747.38,976.38 D3.2@2747.38,1574.8
  Bottom Layer w25: v1(2722.95,1627.95) 2995.28,1900.28 IC3.29
NetD1_2: D1.2 RE1.8 T1.3 | length 2890.2
  Top Layer w25: T1.3 2210.28,712.28 2374.38,876.38 2374.38,1105.98 D1.2
  Bottom Layer w25: T1.3 2011.5,786.26 1890.38,907.38 1862.38,907.38 1862.38,592.38 2007.26,447.5 3269.98,447.5 RE1.8
NetD2_1: D2.1 IC3.11 R3.1 R6.2 | length 4504.3
  Top Layer w25: R3.1 1857.95,1187.38 1824.49,1220.84 D2.1 1857.95,1336.3 R6.2 1857.95,1809.95 1933.38,1885.38 1933.38,3405.38 2232.65,3704.65 2421.11,3704.65 2449.38,3676.38 2449.38,3548.09 2545.38,3452.09 v1(2545.38,2934.38)
  Bottom Layer w25: v1(2545.38,2934.38) 2545.38,2808.38 2576.38,2777.38 3038.01,2777.38 IC3.11
NetIC1_2_2: IC1_2.2 LD1.11 | length 1988
  Top Layer w25: v1(1553.38,5386.38) 1553.38,5926.5 1976.38,6349.5 2257.08,6349.5 2387.2,6219.38 IC1_2.2
  Bottom Layer w25: v1(1553.38,5386.38) 1776.14,5386.38 LD1.11
NetIC1_2_3: IC1_2.3 LD1.4 | length 893.3
  Top Layer w25: IC1_2.3 2337.2,6105.55 2365.08,6077.67 2544.38,6077.67 2548.43,6073.63 LD1.4
NetIC1_2_4: IC1_2.4 LD1.2 | length 2533.6
  Top Layer w25: IC1_2.4 2287.2,6219.38 1950.38,6219.38 1662.38,5931.38 1662.38,5351.38 1685.38,5328.38 2618.14,5328.38 LD1.2
NetIC1_2_5: IC1_2.5 LD1.5 | length 885.7
  Top Layer w25: IC1_2.5 2237.2,6099.38 2312.2,6024.38 2392.38,6024.38 2509.38,5907.38 2509.38,5519.61 LD1.5
NetIC1_2_6: IC1_2.6 LD1.7 | length 964.4
  Top Layer w25: IC1_2.6 2187.2,6076.38 2368.05,5895.53 2455.22,5895.53 2474.38,5876.38 2474.38,5684.61 LD1.7
NetIC1_2_7: IC1_2.7 LD1.8 | length 860.2
  Top Layer w25: IC1_2.7 2137.2,6031.2 1950.38,5844.38 1950.38,5656.71 LD1.8
NetIC1_2_8: IC1_2.8 LD1.9 | length 827.1
  Top Layer w25: LD1.9 1915.38,5591.71 1915.38,5912.55 2087.2,6084.38 IC1_2.8
NetIC1_2_9: IC1_2.9 LD1.6 | length 1589.1
  Top Layer w25: IC1_2.9 2037.2,6085.2 1723.38,5771.38 1723.38,5670.88 1697.38,5644.88 1697.38,5407.38 1726.38,5378.38 2268.14,5378.38 LD1.6
NetIC1_2_12: IC1_2.12 LD1.12 | length 509.9
  Top Layer w25: v1(2037.2,5632.38) IC1_2.12
  Bottom Layer w25: LD1.12 1922.14,5632.38 v1(2037.2,5632.38)
NetIC1_2_13: IC1_2.13 LD1.10 | length 382.9
  Top Layer w25: IC1_2.13 2087.2,5712.55 v1(2090.38,5709.38)
  Bottom Layer w25: LD1.10 2090.38,5600.61 v1(2090.38,5709.38)
NetIC1_2_14: IC1_2.14 LD1.3 | length 721.1
  Top Layer w25: IC1_2.14 2137.2,5651.52 v1(2193.34,5595.38)
  Bottom Layer w25: v1(2193.34,5595.38) 2511.71,5595.38 LD1.3
NetIC1_2_15: IC1_2.15 LD1.1 | length 914.7
  Top Layer w25: v1(2172.38,5851.38) 2187.2,5836.55 IC1_2.15
  Bottom Layer w25: v1(2172.38,5851.38) 2228.38,5795.38 2511.71,5795.38 LD1.1
NetIC1_2_17: IC1_2.17 K1_2.4 | length 1971.4
  Top Layer w25: K1_2.4 v1(1027.95,5578.63) ; IC1_2.17 2287.2,5727.38 v1(2336.38,5696.38)
  Bottom Layer w25: v1(1027.95,5578.63) 1204.7,5755.38 2277.38,5755.38 v1(2336.38,5696.38)
NetIC1_2_18: IC1_2.18 K1_2.2 | length 2147.5
  Top Layer w25: K1_2.2 v1(927.95,5690.95) ; IC1_2.18 v1(2337.2,5851.38)
  Bottom Layer w25: v1(927.95,5690.95) 1132.53,5895.53 2293.05,5895.53 v1(2337.2,5851.38)
NetIC2_1: IC2.1 R11.1 R14.2 | length 1674.2
  Top Layer w25: R14.2 1413.39,2728.38 1297.38,2728.38 1297.38,2620.93 1470.06,2448.25 1739.59,2448.25 1774.72,2483.38 ; v1(1807.38,2450.72) 1774.72,2483.38 ; 1774.72,2483.38 1767.72,2490.38 R11.1 1774.72,2483.38
  Bottom Layer w25: IC2.1 1807.38,2015.45 v1(1807.38,2450.72)
NetIC2_2: IC2.2 R12.2 R15.2 | length 1250
  Top Layer w25: IC2.2 1852.38,2160.45 1852.38,2554.38 1767.72,2639.04 R12.2 1767.72,2730.38 1817.38,2780.04 1817.38,2888.38 1767.72,2938.04 R15.2
NetIC2_6: IC2.6 R1.2 R8.2 | length 1943.2
  Top Layer w25: IC2.6 1380.94,1940.52 1380.94,1918.94 1326.38,1864.38 1285.38,1864.38 1192.38,1957.38 1192.38,3095.38 1301.38,3204.38 1413.39,3204.38 ; R1.2 1413.39,3204.38 ; R8.2 1413.39,3204.38
NetIC2_7: IC2.7 R1.1 R5.2 | length 1310.1
  Top Layer w25: IC2.7 1227.38,1994.08 1227.38,2824.38 1342.52,2939.52 R5.2 R1.1
NetIC3_1: IC3.1 R19.2 | length 3513.3
  Top Layer w25: R19.2 940.95,3498.38 992.38,3498.38 v1(1034.38,3456.38)
  Bottom Layer w25: v1(1034.38,3456.38) 1326.07,3456.38 1334.22,3464.53 1484.38,3464.53 1636.53,3312.38 3109.38,3312.38 3541.38,2880.38 3541.38,2823.38 3576.38,2788.38 4049.01,2788.38 IC3.1
NetIC3_2: IC3.2 K7.2 R16.1 | length 3805.2
  Top Layer w25: R16.1 3622.05,3445.71 3486.38,3581.38 3486.38,3651.38 3514.38,3679.38 3700.38,3679.38 3995.28,3384.48 IC3.2
  Bottom Layer w25: K7.2 2747.68,3669.65 2648.38,3669.65 2647.38,3668.65 2647.38,3576.38 2720.38,3503.38 3564.38,3503.38 3995.28,3072.48 IC3.2
NetIC3_7: IC3.7 K5.1 | length 897.7
  Top Layer w25: IC3.7 3702.38,3041.75 3702.38,3562.98 K5.1
NetIC3_8: IC3.8 K5.2 | length 951.5
  Top Layer w25: IC3.8 3667.38,3106.75 3667.38,3497.98 K5.2
NetIC3_12: IC3.12 K9.1 | length 1523.5
  Top Layer w25: K9.1 2649.38,1798.2 2649.38,2528.38 2745.38,2624.38 2745.38,2851.38 2775.38,2881.38 2948.54,2881.38 IC3.12
NetIC3_13: IC3.13 K9.2 | length 2342
  Bottom Layer w25: K9.2 2748.38,1997.2 2748.38,2272.97 3141.08,2272.97 3141.08,2185.65 3145.38,2181.36 3241.38,2181.36 3241.38,2861.38 3221.38,2881.38 2942.01,2881.38 IC3.13
NetIC3_14: IC3.14 K9.3 | length 1570.1
  Top Layer w25: K9.3 2418.63,1618.38 2576.38,1618.38 2744.38,1786.38 2744.38,2439.38 2795.28,2490.28 IC3.14
NetIC3_15: IC3.15 K9.4 | length 1328.6
  Top Layer w25: K9.4 2545.38,1994.2 2545.38,2562.9 2695.28,2712.8 IC3.15
NetIC3_16: IC3.16 K9.5 | length 1328.6
  Top Layer w25: K9.5 2443.38,1992.2 2443.38,2634.42 2595.28,2786.31 IC3.16
NetIC3_19: IC3.19 R7.1 | length 1554.2
  Top Layer w25: R7.1 2291.02,1551.38 2261.02,1581.38 2176.38,1581.38 2088.38,1669.38 2088.38,2627.75 IC3.19
NetIC3_20: IC3.20 K4.1 | length 3487
  Bottom Layer w25: IC3.20 1539.11,2834.65 1458.38,2915.38 1458.38,3429.53 1370.53,3429.53 1315.38,3374.38 1041.38,3374.38 989.38,3426.38 989.38,3476.38 1215.38,3702.38 2421.24,3702.38 K4.1
NetIC3_21: IC3.21 K4.2 | length 1785.6
  Top Layer w25: v1(2012.38,2410.06) 2012.38,3428.05 2253.97,3669.65 2353.97,3669.65 K4.2
  Bottom Layer w25: v1(2012.38,2410.06) IC3.21
NetIC3_22: IC3.22 K4.3 | length 1448
  Top Layer w25: IC3.22 2341.38,2273.27 2341.38,2881.38 2280.38,2942.38 2280.38,3600.85 K4.3
NetIC3_23: IC3.23 K6.2 | length 2320.4
  Top Layer w25: IC3.23 2395.28,2740.28 2443.38,2788.38 2541.08,2788.38 2541.08,2851.38 2594.38,2904.67 2594.38,3631.38 2710.38,3747.38 3145.54,3747.38 K6.2
NetIC3_24: IC3.24 K6.3 | length 1952.7
  Top Layer w25: IC3.24 2495.28,2628.6 2644.38,2777.7 2644.38,3184.38 2847.38,3387.38 2847.38,3669.38 2873.38,3695.38 3097.54,3695.38 K6.3
NetIC3_27: IC3.27 K11.1 | length 1051.8
  Top Layer w25: IC3.27 2795.28,1256.69 K11.1
NetIC3_28: IC3.28 K11.4 | length 951.8
  Top Layer w25: IC3.28 2895.28,1356.69 K11.4
NetIC3_30: IC3.30 K11.5 | length 2037.5
  Bottom Layer w25: K11.5 3094.92,1241.38 3381.38,1241.38 3541.38,1401.38 3541.38,2273.38 3376.38,2273.38 3349.38,2246.38 3349.38,2211.38 3276.38,2138.38 3126.38,2138.38 3095.28,2169.48 IC3.30
NetIC3_33: IC3.33 K10.1 | length 888.6
  Bottom Layer w25: K10.1 3161.7,1644.38 3062.38,1644.38 3062.38,1769.38 3395.28,2102.28 IC3.33
NetIC3_34: IC3.34 K10.2 | length 693.7
  Bottom Layer w25: K10.2 3495.28,2077.95 IC3.34
NetIC3_35: IC3.35 K12.4 R22.1 | length 2103.2
  Top Layer w25: R22.1 3586.61,1629.38 ; IC3.35 3595.28,1905.04 3586.61,1896.38 3586.61,1629.38 ; K12.4 3973.23,1050.68 4006.24,1083.69 4006.24,1594.52 3971.38,1629.38 3586.61,1629.38
NetIC3_36: IC3.36 K12.2 R21.1 | length 2619
  Top Layer w25: R21.1 3460.63,2092.54 3549.47,2181.38 3549.47,2272.97 3649.47,2272.97 IC3.36 ; K12.2 3876.61,598.35 3876.61,1256.61 v1(3880,1260)
  Bottom Layer w25: IC3.36 3889.38,2033.06 3889.38,1653.7 3880,1644.32 v1(3880,1260)
NetIC3_37: IC3.37 K12.3 | length 2801
  Bottom Layer w25: IC3.37 3866.49,2298.38 4094.38,2298.38 4397.38,1995.38 4397.38,426.38 4370.38,399.38 4068.81,399.38 K12.3
NetIC3_38: IC3.38 K12.5 | length 4001.7
  Top Layer w25: IC3.38 3895.28,2490.48 3641.38,2744.38 3641.38,2851.38 3671.38,2881.38 3941.38,2881.38 3941.38,2819.38 4362.38,2398.38 4362.38,476.38 4261.38,375.38 4192.81,375.38 K12.5
NetIC3_39: IC3.39 K12.7 | length 2128.7
  Bottom Layer w25: IC3.39 4362.38,1860.06 4362.38,476.38 4327.38,441.38 4226.81,441.38 K12.7
NetIC3_40: IC3.40 K12.9 | length 1943.8
  Top Layer w25: IC3.40 4254.05,2227.17 4327.38,2153.84 4327.38,549.11 K12.9
NetK2_2: K2.2 RE1.2 RE1.5 | length 3479.5
  Top Layer w50: RE1.5 3374.47,1340.65 3374.47,1285.53 3658.79,1001.21 3658.79,954.76 RE1.2
  Bottom Layer w50: K2.2 684.35,1432.38 3282.74,1432.38 RE1.5
NetK3_2: K3.2 R2.1 R4.2 R9.2 R13.2 | length 3795.5
  Top Layer w25: K3.2 202.38,2241.72 202.38,3457.38 360.38,3615.38 1342.52,3615.38 R4.2 1342.52,3651.38 1367.52,3676.38 1615.38,3676.38 1669.71,3622.05 R2.1 R9.2 1696.85,3410.38 1647.38,3360.91 1647.38,3252.38 1696.85,3202.91 R13.2
NetK8_1: K8.1 L2.2 | length 343.8
  Top Layer w50: K8.1 531.5,3243.07 L2.2
NetK8_2: K8.2 L2.3 | length 525.4
  Top Layer w50: L2.3 403.7,3415.51 K8.2
NetL2_1: L2.1 T3.2 | length 434.3
  Top Layer w50: T3.2 506.81,2773.98 L2.1
NetR7_2: R7.2 R10.2 T1.2 | length 931.7
  Top Layer w25: T1.2 2015.43,765.43 2326.38,1076.38 2326.38,1162.38 2361.89,1197.89 R10.2 R7.2
NetR11_2: R11.2 R12.1 | length 157.5
  Top Layer w25: R11.2 R12.1
NetR17_1: R17.1 T2.2 T4.1 T5.2 | length 884.3
  Top Layer w25: T5.2 973.62,2511.38 976.38,2514.13 R17.1 976.38,2790.38 984.25,2798.25 T4.1
  Bottom Layer w25: T2.2 T5.2
NetR18_1: R18.1 T2.3 T5.1 | length 886.6
  Top Layer w25: R18.1 577.17,2370.08 T2.3
  Bottom Layer w25: T2.3 608.66,2300.09 676.38,2232.38 929.62,2232.38 1023.62,2326.38 T5.1
NetR18_2: R18.2 T3.1 | length 182.6
  Top Layer w50: R18.2 393.7,2522.38 406.81,2535.49 T3.1
NetR19_1: R19.1 R20.2 T4.2 | length 638
  Top Layer w25: R19.1 870.08,3444.75 830.71,3405.38 R20.2 830.71,3170.08 T4.2
VIN: B1.1 C1.2 R3.2 R17.2 T2.1 T3.3 | length 5846.5
  Top Layer w50: R17.2 665.87,2677.17 T3.3 606.81,2503.42 T2.1 740,2370.24 740,1649.13 C1.2 ; B1.1 1698.5,778.5 1928.82,1008.82 R3.2
  Bottom Layer w50: C1.2 1079.32,1138.38 420,1138.38 420,310.76 571.38,159.38 1539.3,159.38 B1.1
pads on no net: ENCA1.6 ENCA1.7 IC1_2.10 IC1_2.11 IC1_2.19 IC1_2.20 IC3.3 IC3.4 IC3.25 IC3.26 K1_2.6 K1_2.8 K1_2.9 K12.6 K12.8 L1.3 L1.4 RE1.4

## Polygon pours and split planes (outlines as drawn)
GND on Top Layer "GND_L01_P001" (solid, pour order 1): 100,3880 120,3900 4460,3900 4460,100 4440,120 120,120
GND_Display on Top Layer "GND_DISPLAY_L01_P002" (solid, pour order 2): 700,6580 3900,6580 3880,6560 3880,4060 740,4060 720,4080

## Silkscreen, mask and mechanical layers (free items; w line width, h text height)
Top Overlay:
  lines w10: 600,3980 3989.98,3980.21
  text "Designer: Mauro De Bruyn" at 910,6509.99 h60
  text "Project: Soldeerstation" at 910,6389.99 h60
  text "Year: 2022" at 910,6270 h60
  text "Project: Soldeerstation" at 4250,3650 h60 r270
  text "Designer: Mauro De Bruyn" at 4350,3650 h60 r270
  text "Year: 2022" at 4160,3640 h60 r270
Board Outline:
  lines w10: 0,0 4600,0 4600,3980 3980,3980 3980,6680 600,6680 600,3980 0,3980 0,0